# EAGLE board X04A-020-A-XB (EAGLE 9.6.2)
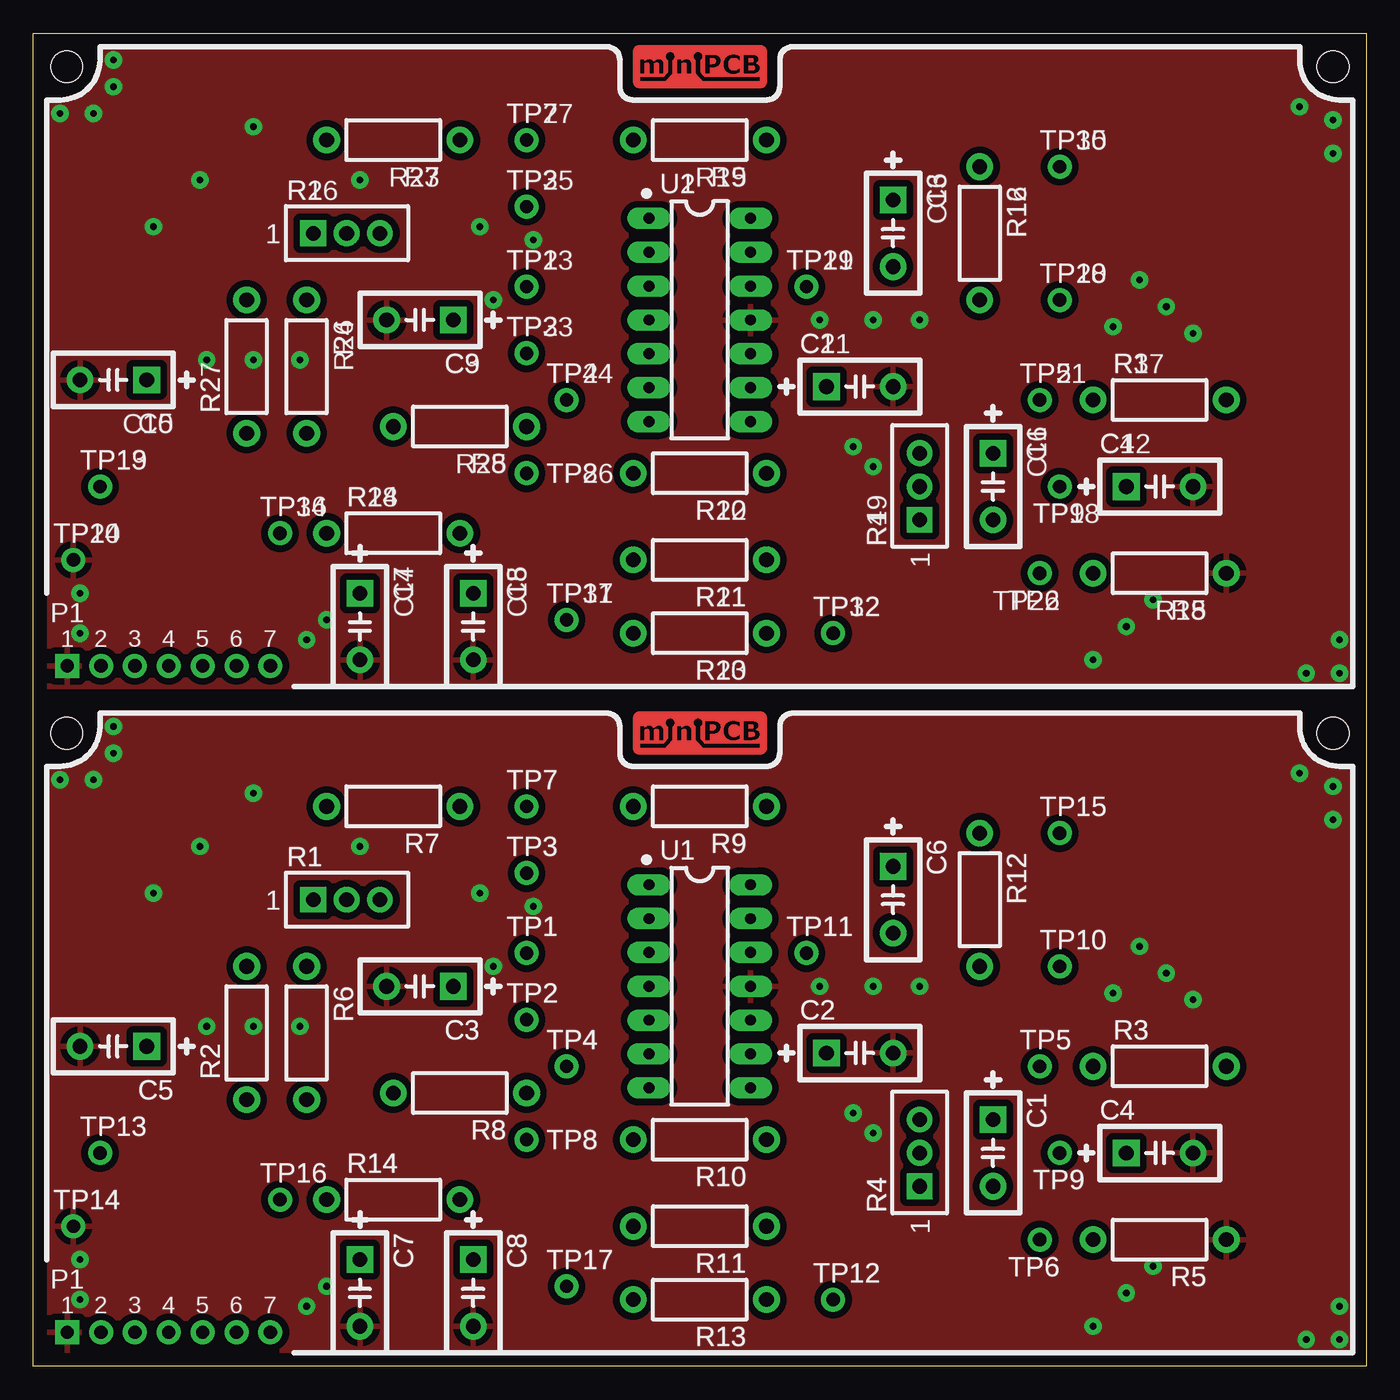
[diagram p0: board, top side]
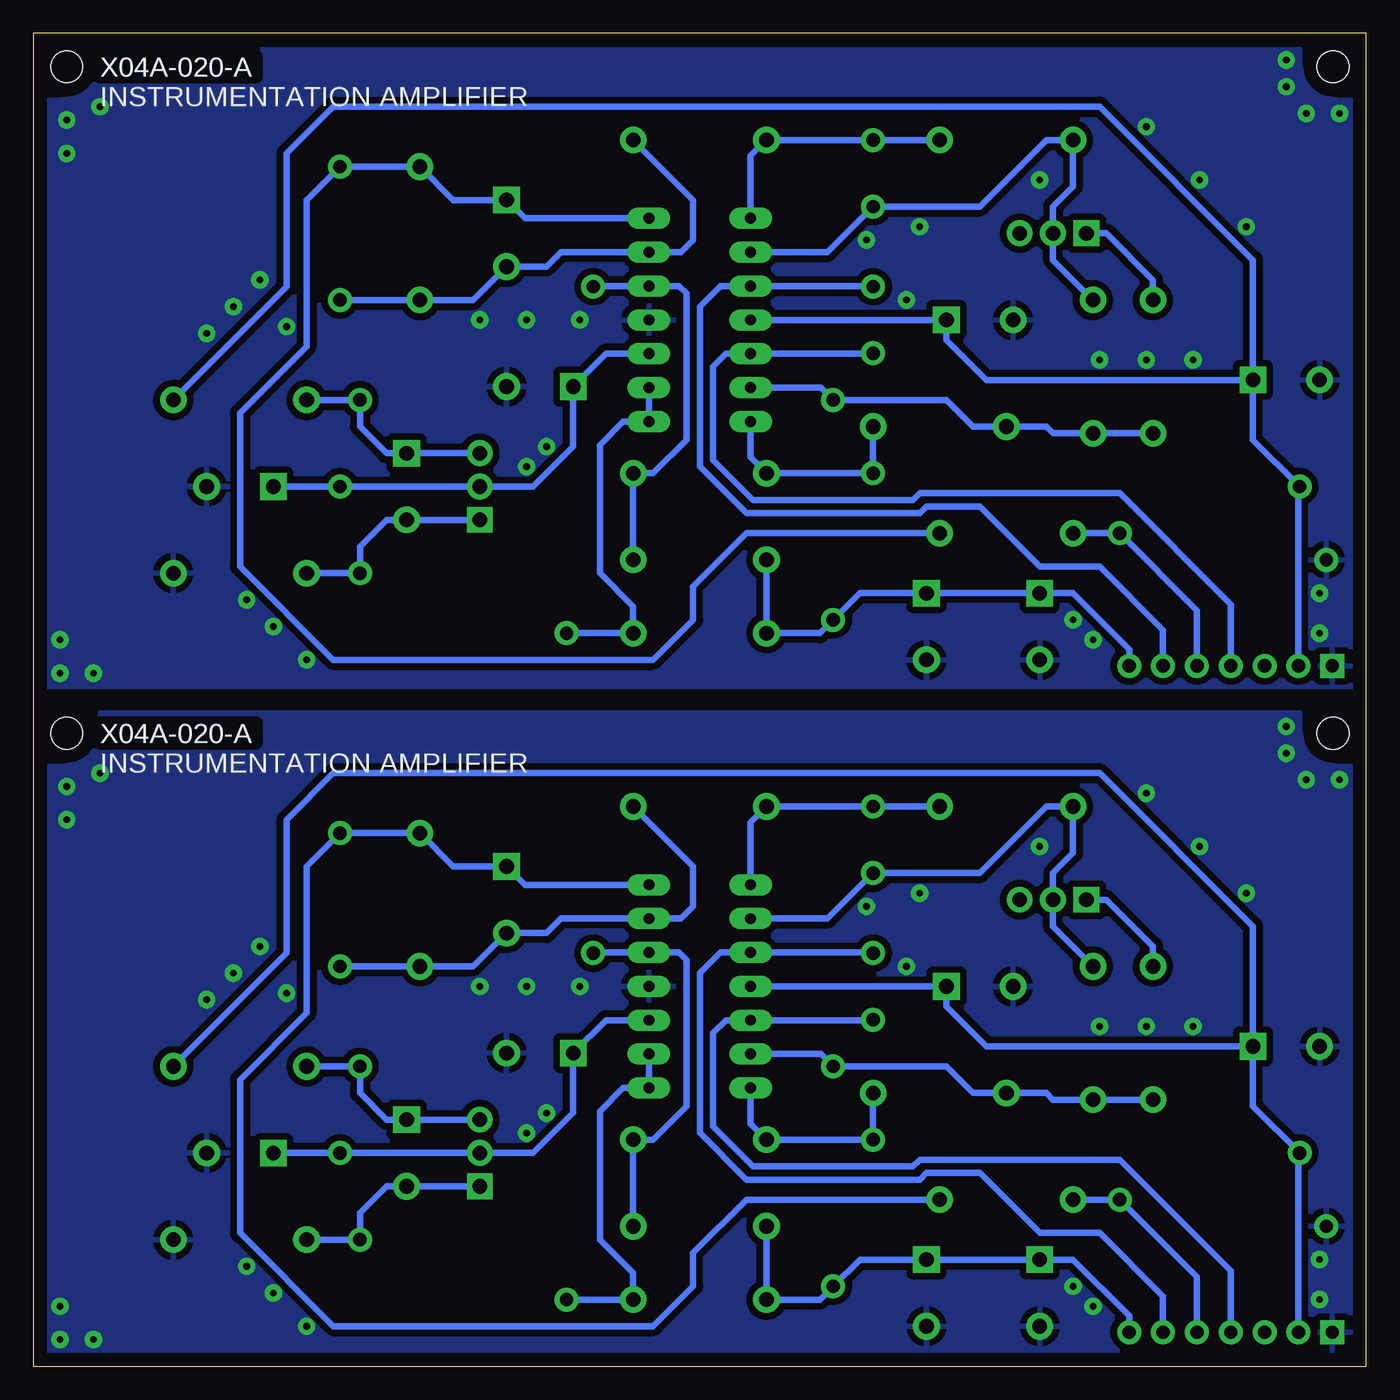
[diagram p1: board, bottom side, seen from below]

Size 100 x 100 mm. Coordinates in mm from the lower left corner, seen from the top.
Outline: 0,0 0,100 100,100 100,0 0,0
Copper layers (1*16): Top 0.035mm / dielectric 1.5mm / Bottom 0.035mm
Design rules "minipcb-THD": minimum track width 0.5mm, minimum drill 0.5mm, track to track 0.5mm, track to pad 0.5mm, pad to pad 0.5mm, via to via 0.5mm, smd to smd 0mil, copper to edge 1mm, drill to drill 1mm, minimum pad ring 0.4mm, minimum via ring 0.4mm, stop-mask expansion 0.1mm, vias tented up to drill 0.6mm, thermal gap 0.5mm

## Footprints (pad centres in the part's own frame; a part is rotated, then mirrored left to right if it is on the bottom)
C050-024X044 = drill 1.1 pad 2 square: 1 -2.5,0 | drill 1.1 pad 2: 2 2.5,0
MINIPCB_7P_50X100 = drill 1 square: 1 2.54,2.54 | drill 1: 2 5.08,2.54; 3 7.62,2.54; 4 10.16,2.54; 5 12.7,2.54; 6 15.24,2.54; 7 17.78,2.54 | hole 2.4: 97.5,47.5; 2.5,47.5
TRIM_0100 = drill 1.1 pad 1.93 square: 1 0,0 | drill 1.1 pad 1.93: 2 2.5,0; 3 5,0
0207/10 = drill 1.1 pad 2: 1 -5,0; 2 5,0
PINS_1_TESTPOINT_KE5000_NOTEXT = drill 1: 1 0,0
DIL14 = drill 0.813 long: 1 -7.62,-3.81; 2 -5.08,-3.81; 3 -2.54,-3.81; 4 0,-3.81; 5 2.54,-3.81; 6 5.08,-3.81; 7 7.62,-3.81; 8 7.62,3.81; 9 5.08,3.81; 10 2.54,3.81; 11 0,3.81; 12 -2.54,3.81; 13 -5.08,3.81; 14 -7.62,3.81

## Placement (x,y rotation side)
C1  [C050-024X044]  72,16 270 top
C2  [C050-024X044]  62,23.5 0 top
C3  [C050-024X044]  29,28.5 180 top
C4  [C050-024X044]  84.5,16 0 top
C5  [C050-024X044]  6,24 180 top
C6  [C050-024X044]  64.5,35 270 top
C7  [C050-024X044]  24.5,5.5 270 top
C8  [C050-024X044]  33,5.5 270 top
C9  [C050-024X044]  29,78.5 180 top
C10  [C050-024X044]  6,74 180 top
C11  [C050-024X044]  62,73.5 0 top
C12  [C050-024X044]  84.5,66 0 top
C13  [C050-024X044]  64.5,85 270 top
C14  [C050-024X044]  24.5,55.5 270 top
C15  [C050-024X044]  33,55.5 270 top
C16  [C050-024X044]  72,66 270 top
E$1  [MINIPCB_PANEL_IMAGEFRAME]  -25,-35 0 top  (outside the outline)
P1-  [MINIPCB_7P_50X100]  0,0 0 top
P1-1  [MINIPCB_7P_50X100]  0,50 0 top
R1  [TRIM_0100]  21,35 0 top
R2  [0207/10]  16,25 90 top
R3  [0207/10]  84.5,22.5 0 top
R4  [TRIM_0100]  66.5,13.5 90 top
R5  [0207/10]  84.5,9.5 180 top
R6  [0207/10]  20.5,25 270 top
R7  [0207/10]  27,42 180 top
R8  [0207/10]  32,20.5 180 top
R9  [0207/10]  50,42 180 top
R10  [0207/10]  50,17 180 top
R11  [0207/10]  50,10.5 180 top
R12  [0207/10]  71,35 270 top
R13  [0207/10]  50,5 180 top
R14  [0207/10]  27,12.5 0 top
R15  [0207/10]  50,92 180 top
R16  [0207/10]  71,85 270 top
R17  [0207/10]  84.5,72.5 0 top
R18  [0207/10]  84.5,59.5 180 top
R19  [TRIM_0100]  66.5,63.5 90 top
R20  [0207/10]  50,55 180 top
R21  [0207/10]  50,60.5 180 top
R22  [0207/10]  50,67 180 top
R23  [0207/10]  27,92 180 top
R24  [0207/10]  20.5,75 270 top
R25  [0207/10]  32,70.5 180 top
R26  [TRIM_0100]  21,85 0 top
R27  [0207/10]  16,75 90 top
R28  [0207/10]  27,62.5 0 top
TP1  [PINS_1_TESTPOINT_KE5000_NOTEXT]  37,31 0 top
TP2  [PINS_1_TESTPOINT_KE5000_NOTEXT]  37,26 0 top
TP3  [PINS_1_TESTPOINT_KE5000_NOTEXT]  37,37 0 top
TP4  [PINS_1_TESTPOINT_KE5000_NOTEXT]  40,22.5 0 top
TP5  [PINS_1_TESTPOINT_KE5000_NOTEXT]  75.5,22.5 0 top
TP6  [PINS_1_TESTPOINT_KE5000_NOTEXT]  75.5,9.5 180 top
TP7  [PINS_1_TESTPOINT_KE5000_NOTEXT]  37,42 0 top
TP8  [PINS_1_TESTPOINT_KE5000_NOTEXT]  37,17 0 top
TP9  [PINS_1_TESTPOINT_KE5000_NOTEXT]  77,16 0 top
TP10  [PINS_1_TESTPOINT_KE5000_NOTEXT]  77,30 0 top
TP11  [PINS_1_TESTPOINT_KE5000_NOTEXT]  58,31 0 top
TP12  [PINS_1_TESTPOINT_KE5000_NOTEXT]  60,5 0 top
TP13  [PINS_1_TESTPOINT_KE5000_NOTEXT]  5,16 0 top
TP14  [PINS_1_TESTPOINT_KE5000_NOTEXT]  3,10.5 0 top
TP15  [PINS_1_TESTPOINT_KE5000_NOTEXT]  77,40 0 top
TP16  [PINS_1_TESTPOINT_KE5000_NOTEXT]  18.5,12.5 0 top
TP17  [PINS_1_TESTPOINT_KE5000_NOTEXT]  40,6 0 top
TP18  [PINS_1_TESTPOINT_KE5000_NOTEXT]  77,66 0 top
TP19  [PINS_1_TESTPOINT_KE5000_NOTEXT]  5,66 0 top
TP20  [PINS_1_TESTPOINT_KE5000_NOTEXT]  3,60.5 0 top
TP21  [PINS_1_TESTPOINT_KE5000_NOTEXT]  75.5,72.5 0 top
TP22  [PINS_1_TESTPOINT_KE5000_NOTEXT]  75.5,59.5 180 top
TP23  [PINS_1_TESTPOINT_KE5000_NOTEXT]  37,81 0 top
TP24  [PINS_1_TESTPOINT_KE5000_NOTEXT]  40,72.5 0 top
TP25  [PINS_1_TESTPOINT_KE5000_NOTEXT]  37,87 0 top
TP26  [PINS_1_TESTPOINT_KE5000_NOTEXT]  37,67 0 top
TP27  [PINS_1_TESTPOINT_KE5000_NOTEXT]  37,92 0 top
TP28  [PINS_1_TESTPOINT_KE5000_NOTEXT]  77,80 0 top
TP29  [PINS_1_TESTPOINT_KE5000_NOTEXT]  58,81 0 top
TP30  [PINS_1_TESTPOINT_KE5000_NOTEXT]  77,90 0 top
TP31  [PINS_1_TESTPOINT_KE5000_NOTEXT]  40,56 0 top
TP32  [PINS_1_TESTPOINT_KE5000_NOTEXT]  60,55 0 top
TP33  [PINS_1_TESTPOINT_KE5000_NOTEXT]  37,76 0 top
TP34  [PINS_1_TESTPOINT_KE5000_NOTEXT]  18.5,62.5 0 top
U1  OPAMP_QUADTHD  [DIL14]  50,28.5 270 top
U2  OPAMP_QUADTHD  [DIL14]  50,78.5 270 top

## Library data of the parts
C1-C16 E$1 R1-R28 TP1-TP34 U1 U2 = minipcb
P1- P1-1 = minipcb; PART_NUMBER: X04A-020-A

## Nets
BIAS: C2.1 C4.1 R4.2 TP9.1 U1.10
BIAS1: C11.1 C12.1 R19.2 TP18.1 U2.10
GND: C2.2 C3.2 C4.2 C5.2 C7.2 C8.2 P1-.1 R5.1 TP14.1 U1.11
GND1: C9.2 C10.2 C11.2 C12.2 C14.2 C15.2 P1-1.1 R18.1 TP20.1 U2.11
N$1: R10.1 R11.1 TP11.1 U1.12
N$2: C7.1 C8.1 P1-.7 R11.2 R13.2 TP17.1
N$3: P1-.4 TP2.1 U1.5
N$4: P1-.6 TP1.1 U1.3
N$5: R1.2 R6.1 R7.2 TP3.1 U1.2
N$6: R2.1 R6.2 R8.2 TP4.1 U1.6
N$7: R7.1 R9.2 TP7.1 U1.1
N$8: R8.1 R10.2 TP8.1 U1.7
N$9: R13.1 TP12.1 U1.8 U1.9
N$10: R1.1 R2.2
N$11: P1-.5 R14.1 TP16.1
N$12: R21.1 R22.1 TP29.1 U2.12
N$13: C14.1 C15.1 P1-1.7 R20.2 R21.2 TP31.1
N$14: P1-1.4 TP33.1 U2.5
N$15: P1-1.6 TP23.1 U2.3
N$16: R23.2 R24.1 R26.2 TP25.1 U2.2
N$17: R24.2 R25.2 R27.1 TP24.1 U2.6
N$18: R15.2 R23.1 TP27.1 U2.1
N$19: R22.2 R25.1 TP26.1 U2.7
N$20: R20.1 TP32.1 U2.8 U2.9
N$21: R26.1 R27.2
N$22: P1-1.5 R28.1 TP34.1
NC: P1-.3
NC1: P1-1.3
OUT: C6.1 R12.1 R14.2 TP15.1 U1.14
OUT1: C13.1 R16.1 R28.2 TP30.1 U2.14
POT.1: C1.2 R4.1 R5.2 TP6.1
POT.2: C16.1 R17.1 R19.3 TP21.1
POT.3: C1.1 R3.1 R4.3 TP5.1
POT.4: C16.2 R18.2 R19.1 TP22.1
V+: C3.1 C5.1 P1-.2 R3.2 TP13.1 U1.4
V+1: C9.1 C10.1 P1-1.2 R17.2 TP19.1 U2.4
VFB: C6.2 R9.1 R12.2 TP10.1 U1.13
VFB1: C13.2 R15.1 R16.2 TP28.1 U2.13

## Tracks (layer width: path | path; a pad name or v marks a point on that pad's centre or on a via)
BIAS
  Bottom 0.5: U1.10 57.04,25.96 C2.1 59.5,19 62.5,16 R4.2 TP9.1 C4.1
BIAS1
  Bottom 0.5: U2.10 57.04,75.96 C11.1 59.5,69 62.5,66 R19.2 TP18.1 C12.1
GND  (via drill 0.5)
  other vias: 98,2 98,4.5 95.5,2 79.5,3 82,5.5 84,7.5 81,28 83,31.5 85,29.5 87,27.5 59,28.5 63,28.5 66.5,28.5 61.5,19 63,17.5 37.5,34.5 33.5,35.5 34.5,30 24.5,39 20,25.5 16.5,25.5 13,25.5 16.5,43 12.5,39 9,35.5 22,6 20.5,4.5 97.5,43.5 95,44.5 97.5,41 2,44 4.5,44 6,46 6,48 3.5,8 3.5,5
  pour Bottom: 1,1 99,1 99,45 98,45 arc-90 95,48 95,49 5,49 5,48 arc-90 2,45 1,45
  pour Top: 1,1 99,1 99,45 98,45 arc-90 95,48 95,49 57,49 arc90 56,48 56,46 arc-90 55,45 45,45 arc-90 44,46 44,48 arc90 43,49 5,49 5,48 arc-90 2,45 1,45
GND1  (via drill 0.5)
  other vias: 98,52 98,54.5 95.5,52 79.5,53 82,55.5 84,57.5 81,78 83,81.5 85,79.5 87,77.5 59,78.5 63,78.5 66.5,78.5 61.5,69 63,67.5 37.5,84.5 33.5,85.5 34.5,80 24.5,89 20,75.5 16.5,75.5 13,75.5 16.5,93 12.5,89 9,85.5 22,56 20.5,54.5 97.5,93.5 95,94.5 97.5,91 2,94 4.5,94 6,96 6,98 3.5,58 3.5,55
  pour Bottom: 1,51 99,51 99,95 98,95 arc-90 95,98 95,99 5,99 5,98 arc-90 2,95 1,95
  pour Top: 1,51 99,51 99,95 98,95 arc-90 95,98 95,99 57,99 arc90 56,98 56,96 arc-90 55,95 45,95 arc-90 44,96 44,98 arc90 43,99 5,99 5,98 arc-90 2,95 1,95
N$1
  Bottom 0.5: R11.1 R10.1 53.5,17 51,19.5 51,30.5 51.54,31.04 U1.12 57.96,31.04 TP11.1
N$2
  Bottom 0.5: P1-.7 17.78,3.78 22,8 C7.1 C8.1 38,8 TP17.1 41,5 R13.2 R11.2
N$3
  Bottom 0.5: TP2.1 37.04,25.96 U1.5 48.04,25.96 49,25 49,18 46,15 34,15 33.5,15.5 18.5,15.5 10.16,7.16 P1-.4
N$4
  Bottom 0.5: TP1.1 37.04,31.04 U1.3 48.46,31.04 50,29.5 50,17.5 46.5,14 33.5,14 33,14.5 29,14.5 24.5,10 20,10 15.24,5.24 P1-.6
N$5
  Bottom 0.5: R6.1 23.5,33 R1.2 23.5,37 22,38.5 R7.2 24,42 29,37 TP3.1 40.42,33.58 U1.2
N$6
  Bottom 0.5: R2.1 R6.2 23.5,20 24,20.5 R8.2 29.5,20.5 31.5,22.5 TP4.1 40.92,23.42 U1.6
N$7
  Bottom 0.5: R7.1 TP7.1 R9.2 46.19,40.81 U1.1
N$8
  Bottom 0.5: R8.1 TP8.1 R10.2 46.19,18.19 U1.7
N$9
  Bottom 0.5: TP12.1 R13.1 55,7 57.5,9.5 57.5,19.12 55.74,20.88 U1.8 U1.9
N$10
  Bottom 0.5: R2.2 16,31.5 19.5,35 R1.1
N$11
  Bottom 0.5: P1-.5 12.7,6.7 TP16.1 R14.1
N$12
  Bottom 0.5: R21.1 R22.1 53.5,67 51,69.5 51,80.5 51.54,81.04 U2.12 57.96,81.04 TP29.1
N$13
  Bottom 0.5: P1-1.7 17.78,53.78 22,58 C14.1 C15.1 38,58 TP31.1 41,55 R20.2 R21.2
N$14
  Bottom 0.5: TP33.1 37.04,75.96 U2.5 48.04,75.96 49,75 49,68 46,65 34,65 33.5,65.5 18.5,65.5 10.16,57.16 P1-1.4
N$15
  Bottom 0.5: TP23.1 37.04,81.04 U2.3 48.46,81.04 50,79.5 50,67.5 46.5,64 33.5,64 33,64.5 29,64.5 24.5,60 20,60 15.24,55.24 P1-1.6
N$16
  Bottom 0.5: R24.1 23.5,83 R26.2 23.5,87 22,88.5 R23.2 24,92 29,87 TP25.1 40.42,83.58 U2.2
N$17
  Bottom 0.5: R27.1 R24.2 23.5,70 24,70.5 R25.2 29.5,70.5 31.5,72.5 TP24.1 40.92,73.42 U2.6
N$18
  Bottom 0.5: R23.1 TP27.1 R15.2 46.19,90.81 U2.1
N$19
  Bottom 0.5: R25.1 TP26.1 R22.2 46.19,68.19 U2.7
N$20
  Bottom 0.5: TP32.1 R20.1 55,57 57.5,59.5 57.5,69.12 55.74,70.88 U2.8 U2.9
N$21
  Bottom 0.5: R27.2 16,81.5 19.5,85 R26.1
N$22
  Bottom 0.5: P1-1.5 12.7,56.7 TP34.1 R28.1
OUT
  Bottom 0.5: U1.14 63.12,36.12 C6.1 68.5,37.5 R12.1 TP15.1 79.5,37.5 79.5,26.5 84.5,21.5 84.5,10 77.5,3 53.5,3 50.5,6 50.5,8.5 46.5,12.5 R14.2
OUT1
  Bottom 0.5: U2.14 63.12,86.12 C13.1 68.5,87.5 R16.1 TP30.1 79.5,87.5 79.5,76.5 84.5,71.5 84.5,60 77.5,53 53.5,53 50.5,56 50.5,58.5 46.5,62.5 R28.2
POT.1
  Bottom 0.5: C1.2 R4.1 73.5,13.5 75.5,11.5 TP6.1 R5.2
POT.2
  Bottom 0.5: C16.1 R19.3 73.5,68.5 75.5,70.5 TP21.1 R17.1
POT.3
  Bottom 0.5: C1.1 R4.3 73.5,18.5 75.5,20.5 TP5.1 R3.1
POT.4
  Bottom 0.5: C16.2 R19.1 73.5,63.5 75.5,61.5 TP22.1 R18.2
V+
  Bottom 0.5: P1-.2 5.08,15.92 TP13.1 8.5,19.5 C5.1 | C5.1 28.5,24 31.5,27 C3.1 U1.4 | R3.2 81,31 81,41 77.5,44.5 20,44.5 8.5,33 C5.1
V+1
  Bottom 0.5: P1-1.2 5.08,65.92 TP19.1 8.5,69.5 C10.1 | C10.1 28.5,74 31.5,77 C9.1 U2.4 | R17.2 81,81 81,91 77.5,94.5 20,94.5 8.5,83 C10.1
VFB
  Bottom 0.5: TP10.1 R12.2 67,30 C6.2 61.5,32.5 60.42,33.58 U1.13 51.42,33.58 50.5,34.5 50.5,37.5 R9.1
VFB1
  Bottom 0.5: TP28.1 R16.2 67,80 C13.2 61.5,82.5 60.42,83.58 U2.13 51.42,83.58 50.5,84.5 50.5,87.5 R15.1

## Text on the board
bPlace: INSTRUMENTATION AMPLIFIER | INSTRUMENTATION AMPLIFIER
_tNames: TP7 | TP15 | R7 | R9 | C6 | R1 | TP3 | U1 | R12 | TP1 | TP11 | TP10 | R6 | TP2 | C3 | C2 | R3 | TP4 | TP5 | C5 | R2 | C1 | R8 | C4 | TP13 | TP8 | R10 | TP16 | R14 | TP9 | TP14 | R4 | C7 | C8 | R11 | TP6 | R5 | TP17 | TP12 | R13 | TP7 | TP15 | R7 | R9 | C6 | R1 | TP3 | U1 | R12 | TP1 | TP11 | TP10 | R6 | TP2 | C3 | C2 | R3 | TP4 | TP5 | C5 | R2 | C1 | R8 | C4 | TP13 | TP8 | R10 | TP16 | R14 | TP9 | TP14 | R4 | C7 | C8 | R11 | TP6 | R5 | TP17 | TP12 | R13